# EAGLE board untitled (EAGLE 8.5.1)
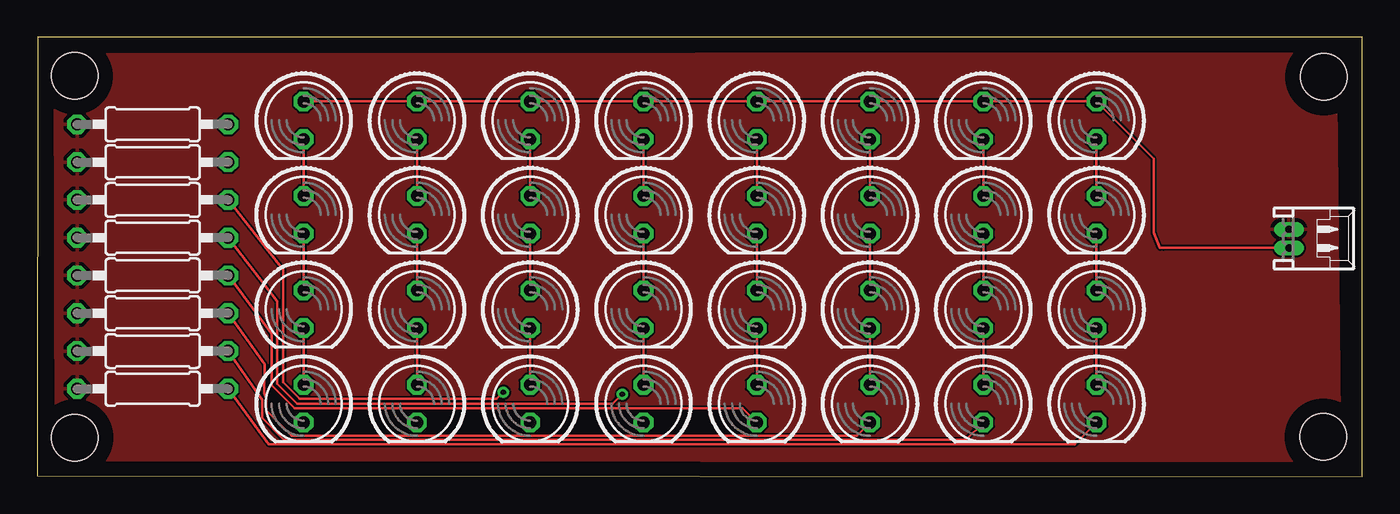
[diagram p0: board, top side]
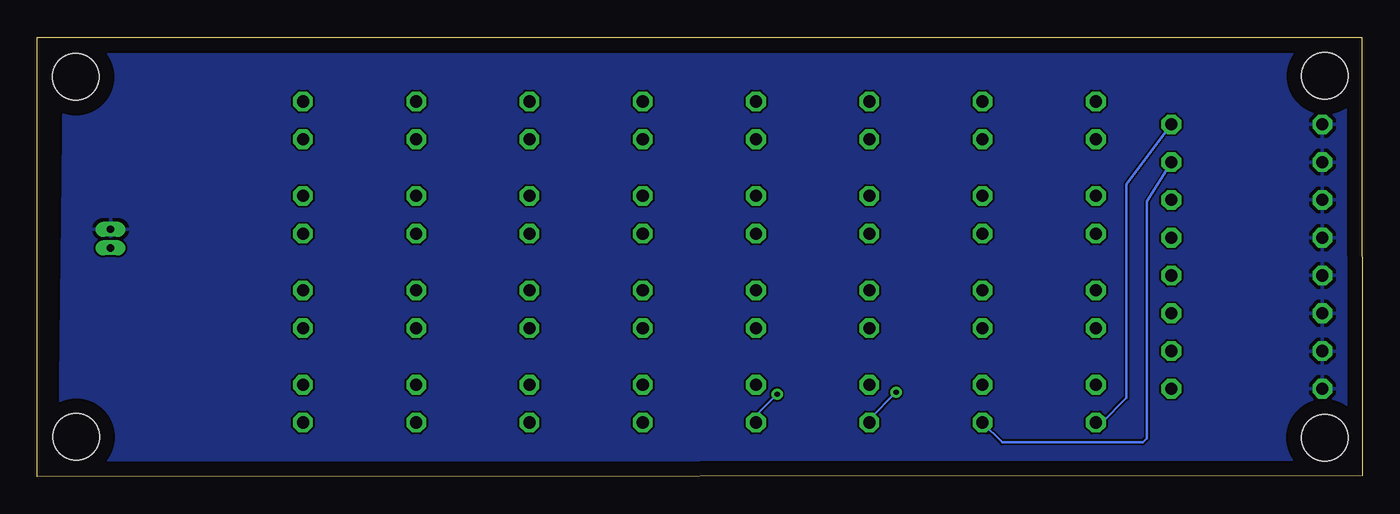
[diagram p1: board, bottom side, seen from below]

Size 89.15 x 29.55 mm. Coordinates in mm from the lower left corner, seen from the top.
Outline: 0,0.04 89.15,0 89.15,29.55 0.05,29.55 0,0.04
Copper layers (1*16): Top 0.035mm / dielectric 1.5mm / Bottom 0.035mm
Design rules "default *": minimum track width 5mil, minimum drill 0.35mm, track to track 5mil, track to pad 5mil, pad to pad 5mil, via to via 5mil, smd to smd 6mil, copper to edge 40mil, drill to drill 8mil, minimum pad ring 10mil, minimum via ring 8mil, stop-mask expansion 4mil, vias tented up to drill 0mil, thermal gap 10mil
Holes 3.12 mm at 2.54,2.62 2.52,26.94 86.56,26.89 86.52,2.66

## Footprints (pad centres in the part's own frame; a part is rotated, then mirrored left to right if it is on the bottom)
LED5MM = drill 0.813 octagon: A -1.27,0; K 1.27,0
0207/10 = drill 0.813 octagon: 1 -5.08,0; 2 5.08,0
53048-02 = drill 0.5 pad 0.698 long: 1 0.625,-1.25; 2 -0.625,-1.25

## Placement (x,y rotation side)
LED1  [LED5MM]  63.65,4.9 270 top
LED2  [LED5MM]  63.65,11.25 270 top
LED3  [LED5MM]  63.65,17.6 270 top
LED4  [LED5MM]  63.65,23.95 270 top
LED5  [LED5MM]  56.03,4.9 270 top
LED6  [LED5MM]  56.03,11.25 270 top
LED7  [LED5MM]  56.03,17.6 270 top
LED8  [LED5MM]  56.03,23.95 270 top
LED9  [LED5MM]  48.41,4.9 270 top
LED10  [LED5MM]  48.41,11.25 270 top
LED11  [LED5MM]  48.41,17.6 270 top
LED12  [LED5MM]  48.41,23.95 270 top
LED13  [LED5MM]  40.79,4.9 270 top
LED14  [LED5MM]  40.79,11.25 270 top
LED15  [LED5MM]  40.79,17.6 270 top
LED16  [LED5MM]  40.79,23.95 270 top
LED17  [LED5MM]  33.17,4.9 270 top
LED18  [LED5MM]  33.17,11.25 270 top
LED19  [LED5MM]  33.17,17.6 270 top
LED20  [LED5MM]  33.17,23.95 270 top
LED21  [LED5MM]  71.27,4.9 270 top
LED22  [LED5MM]  71.27,11.25 270 top
LED23  [LED5MM]  71.27,17.6 270 top
LED24  [LED5MM]  71.27,23.95 270 top
LED25  [LED5MM]  25.55,4.9 270 top
LED26  [LED5MM]  25.55,11.25 270 top
LED27  [LED5MM]  25.55,17.6 270 top
LED28  [LED5MM]  25.55,23.95 270 top
LED29  [LED5MM]  17.93,4.9 270 top
LED30  [LED5MM]  17.93,11.25 270 top
LED31  [LED5MM]  17.93,17.6 270 top
LED32  [LED5MM]  17.93,23.95 270 top
R1  180  [0207/10]  7.77,8.44 0 top
R2  180  [0207/10]  7.77,10.98 0 top
R3  180  [0207/10]  7.77,13.52 0 top
R4  180  [0207/10]  7.77,16.06 0 top
R5  180  [0207/10]  7.77,18.6 0 top
R6  180  [0207/10]  7.77,5.9 0 top
R7  180  [0207/10]  7.77,21.14 0 top
R8  180  [0207/10]  7.77,23.68 0 top
X1  53048-02  [53048-02]  85.46,16 270 top

## Library data of the parts
LED1-LED32 = led; MPN: C503B-RCN-CW0Z0AA1; OC_NEWARK: 08R2993
R1-R8 = rcl; MF: FARNELL; MPN: MCF 0.25W 180R; OC_NEWARK: 38K0345; SPICEPREFIX: R
X1 = con-molex; MPN: 53048-0210; OC_FARNELL: 1012259; OC_NEWARK: 57H4718

## Nets
GND: R1.1 R2.1 R3.1 R4.1 R5.1 R6.1 R7.1 R8.1 X1.2
N$1: LED19.A LED20.K
N$2: LED18.A LED19.K
N$3: LED17.A LED18.K
N$4: LED31.A LED32.K
N$5: LED17.K R5.2
N$6: LED30.A LED31.K
N$7: LED29.A LED30.K
N$8: LED27.A LED28.K
N$9: LED26.A LED27.K
N$10: LED25.A LED26.K
N$11: LED29.K R8.2
N$12: LED25.K R7.2
N$13: LED23.A LED24.K
N$14: LED22.A LED23.K
N$15: LED21.A LED22.K
N$16: LED21.K R6.2
N$17: LED15.A LED16.K
N$18: LED14.A LED15.K
N$19: LED13.A LED14.K
N$20: LED13.K R4.2
N$21: LED11.A LED12.K
N$22: LED10.A LED11.K
N$23: LED9.A LED10.K
N$24: LED9.K R3.2
N$25: LED7.A LED8.K
N$26: LED6.A LED7.K
N$27: LED5.A LED6.K
N$28: LED5.K R2.2
N$29: LED3.A LED4.K
N$30: LED2.A LED3.K
N$31: LED1.A LED2.K
N$32: LED1.K R1.2
VCC: LED4.A LED8.A LED12.A LED16.A LED20.A LED24.A LED28.A LED32.A X1.1

## Tracks (layer width: path | path; a pad name or v marks a point on that pad's centre or on a via)
GND
  pour Top: 1.17,28.41 1.24,1.05 87.68,0.8 87.36,28.47
  pour Bottom: 1.05,1.02 87.67,0.81 87.34,28.48 1.1,28.42
N$1
  Top 0.152: LED20.K LED19.A
N$2
  Top 0.152: LED19.K LED18.A
N$3
  Top 0.152: LED18.K LED17.A
N$4
  Top 0.152: LED32.K LED31.A
N$5  (via drill 0.35)
  Top 0.152: R5.2 16.55,13.9 16.55,6.33 17.64,5.24 30.92,5.24 v31.36,5.68
  Bottom 0.152: v31.36,5.68 33.17,3.87 LED17.K
N$6
  Top 0.152: LED31.K LED30.A
N$7
  Top 0.152: LED30.K LED29.A
N$8
  Top 0.152: LED28.K LED27.A
N$9
  Top 0.152: LED27.K LED26.A
N$10
  Top 0.152: LED26.K LED25.A
N$11
  Bottom 0.152: R8.2 15.87,19.67 15.87,5.3 17.53,3.63 LED29.K
N$12
  Bottom 0.152: R7.2 14.49,18.51 14.49,2.58 14.77,2.3 24.22,2.3 LED25.K
N$13
  Top 0.152: LED24.K LED23.A
N$14
  Top 0.152: LED23.K LED22.A
N$15
  Top 0.152: LED22.K LED21.A
N$16
  Top 0.152: R6.2 15.57,2.19 69.82,2.19 LED21.K
N$17
  Top 0.152: LED16.K LED15.A
N$18
  Top 0.152: LED15.K LED14.A
N$19
  Top 0.152: LED14.K LED13.A
N$20  (via drill 0.35)
  Top 0.152: R4.2 16.13,11.78 16.13,6.25 17.5,4.89 38.71,4.89 v39.37,5.54
  Bottom 0.152: v39.37,5.54 40.79,4.12 LED13.K
N$21
  Top 0.152: LED12.K LED11.A
N$22
  Top 0.152: LED11.K LED10.A
N$23
  Top 0.152: LED10.K LED9.A
N$24
  Top 0.152: R3.2 15.77,9.6 15.77,6.15 17.32,4.61 47.44,4.61 LED9.K
N$25
  Top 0.152: LED8.K LED7.A
N$26
  Top 0.152: LED7.K LED6.A
N$27
  Top 0.152: LED6.K LED5.A
N$28
  Top 0.152: R2.2 15.29,7.54 15.28,5.64 15.41,5.28 15.41,4.46 17.11,2.76 55.15,2.76 LED5.K
N$29
  Top 0.152: LED4.K LED3.A
N$30
  Top 0.152: LED3.K LED2.A
N$31
  Top 0.152: LED2.K LED1.A
N$32
  Top 0.152: R1.2 15.13,5.16 15.13,3.94 16.6,2.48 62.49,2.48 LED1.K
VCC
  Top 0.152: LED32.A LED28.A LED20.A LED16.A LED12.A LED8.A LED4.A LED24.A 75.12,21.37 75.13,16.38 75.54,15.38 75.79,15.38 X1.1